# Altium PCB STM_System_Board.PCBDOC (part 3 of 16)
Units mm, origin at the board's own origin, x right, y up, seen from the top; angles counter-clockwise.
Board outline 222.53 x 100.01 mm, 6 copper layers (Top Layer, Int1 (GND), Int2 (Sign), Layer 1, Layer 2, Bottom Layer), stack 1.526 mm thick; 702 components, 774 nets, 3596 pads, 1988 vias.
Unrouted connection lines stored in the file: 1.
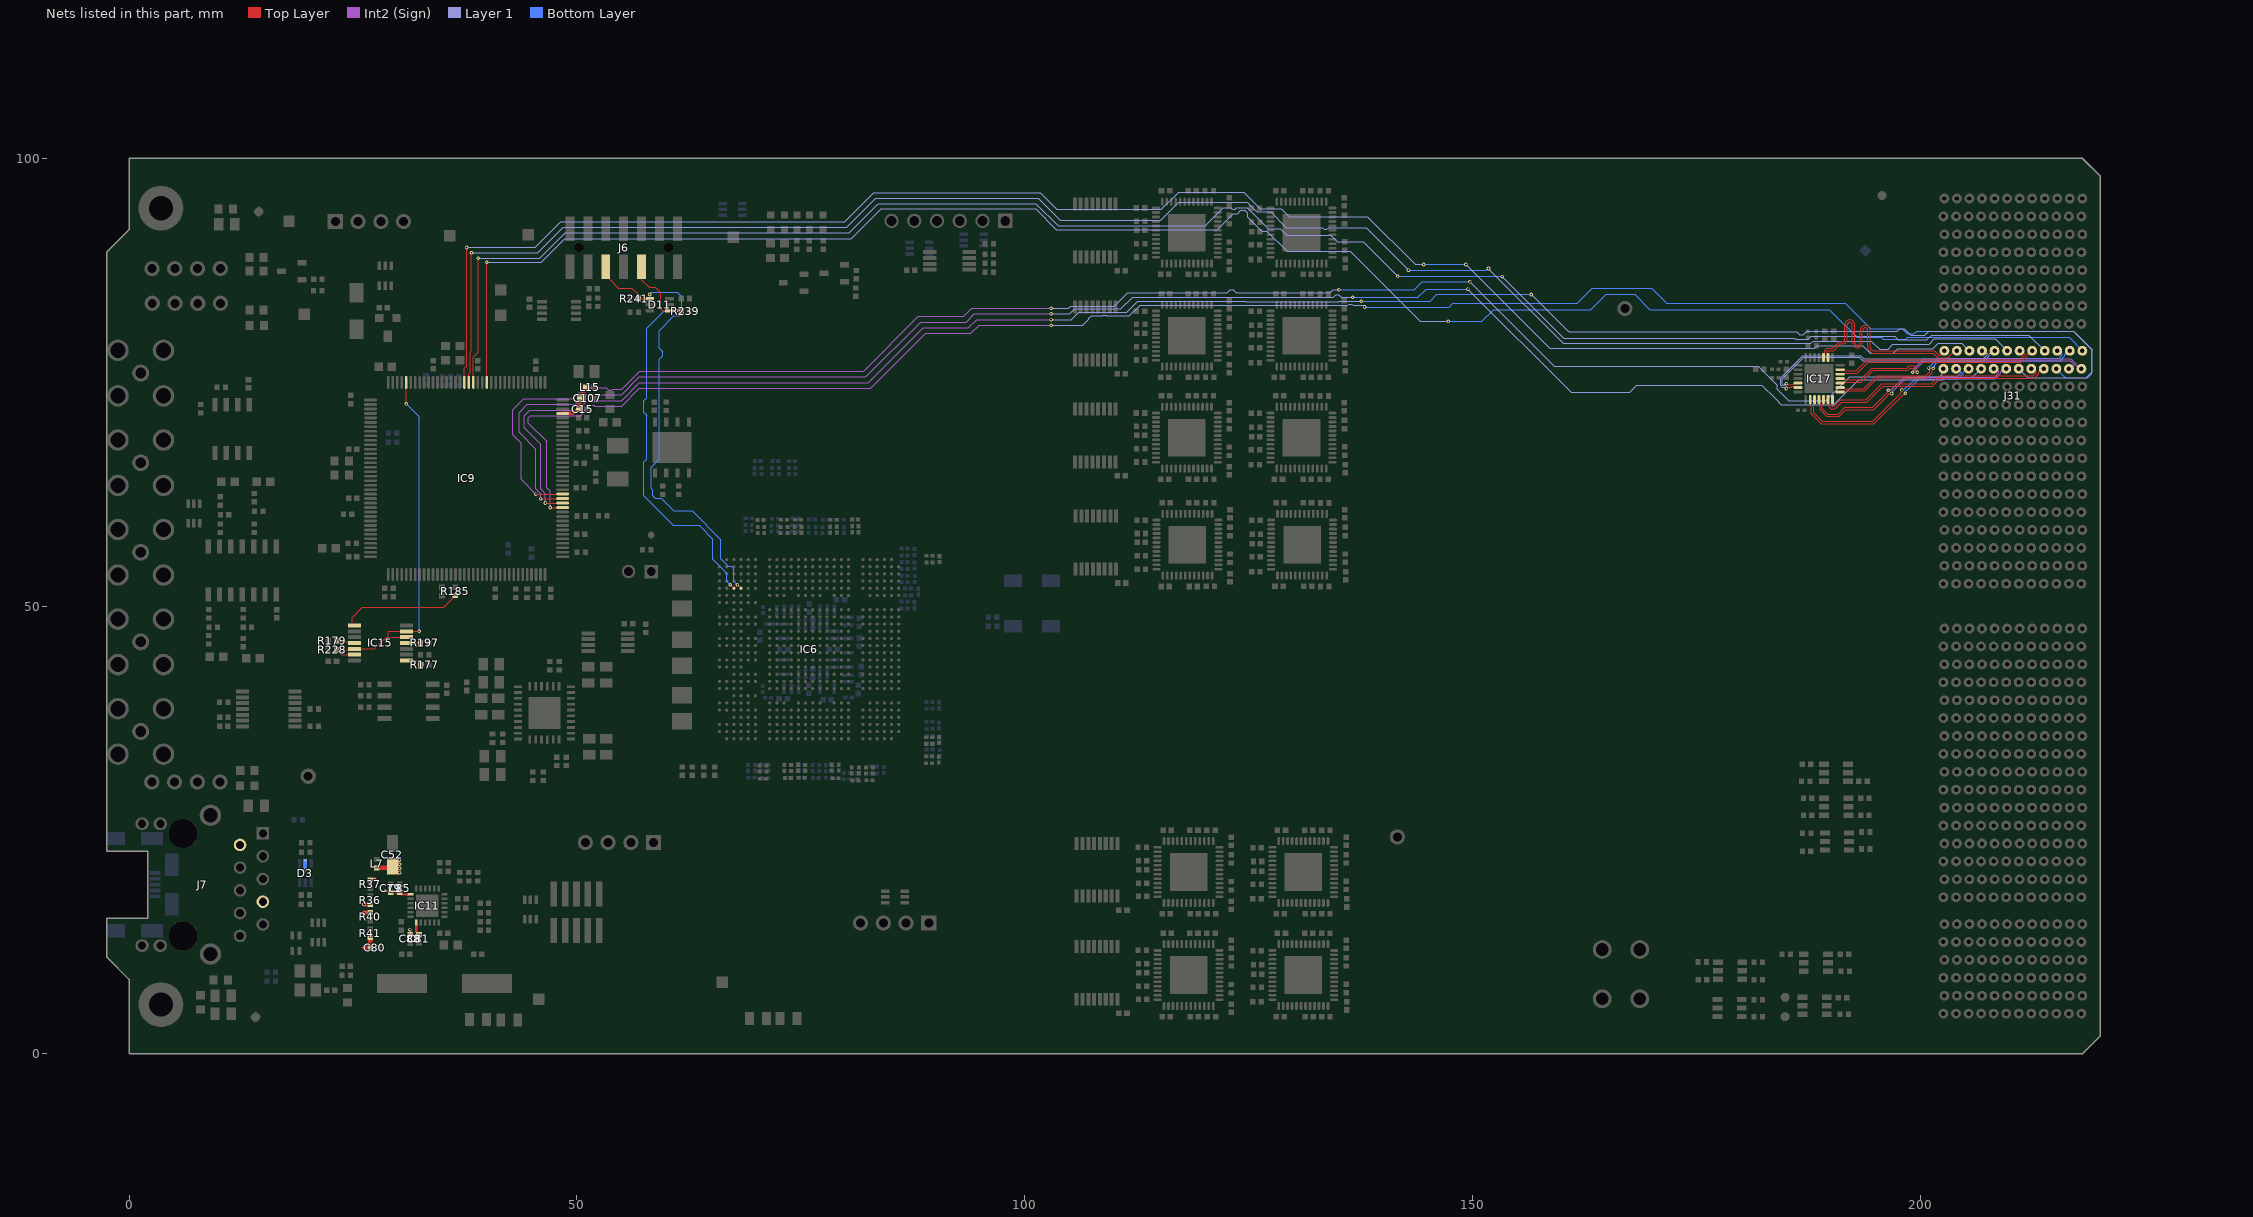
[diagram p7: the nets of this part, all layers, seen from the top]

## Footprints (in the part's own frame and the unit in brackets; to place one, negate y for a bottom-side part, rotate by r counter-clockwise, add the part's x,y. Pads: shape width x height; smd on the part's side, far side on the other; paste and mask are expansions set on the pad) (continued)
QFN50P700X700X100-49N-S420 [mm] "QFN, 0.50mm Pitch, Square; 48 Pin, 7.00mm L X 7.00mm W X 1mm H body (W/Thermal Tab 4.2mm X 4.2mm), IPC Medium Density"
  oval 0.9x0.3 smd: 1(-3.45,2.75) 2(-3.45,2.25) 3(-3.45,1.75) 4(-3.45,1.25) 5(-3.45,0.75) 6(-3.45,0.25) 7(-3.45,-0.25) 8(-3.45,-0.75) 9(-3.45,-1.25) 10(-3.45,-1.75) 11(-3.45,-2.25) 12(-3.45,-2.75) 25(3.45,-2.75) 26(3.45,-2.25) 27(3.45,-1.75) 28(3.45,-1.25) 29(3.45,-0.75) 30(3.45,-0.25) 31(3.45,0.25) 32(3.45,0.75) 33(3.45,1.25) 34(3.45,1.75) 35(3.45,2.25) 36(3.45,2.75)
  oval 0.3x0.9 smd: 13(-2.75,-3.45) 14(-2.25,-3.45) 15(-1.75,-3.45) 16(-1.25,-3.45) 17(-0.75,-3.45) 18(-0.25,-3.45) 19(0.25,-3.45) 20(0.75,-3.45) 21(1.25,-3.45) 22(1.75,-3.45) 23(2.25,-3.45) 24(2.75,-3.45) 37(2.75,3.45) 38(2.25,3.45) 39(1.75,3.45) 40(1.25,3.45) 41(0.75,3.45) 42(0.25,3.45) 43(-0.25,3.45) 44(-0.75,3.45) 45(-1.25,3.45) 46(-1.75,3.45) 47(-2.25,3.45) 48(-2.75,3.45)
  rect 4.2x4.2 smd: 49(0,0)
  silkscreen extent -4.25,-3.5 3.5,3.5, body extent -3.5,-3.5 3.5,3.5, height 1
RESC0603X28N [mm] "Chip Resistor, EIA 0201, Metric 0603, Body 0.6 x 0.3mm, IPC Medium Density"
  rect 0.46x0.42 smd: 1(-0.33,0) 2(0.33,0)
  body extent -0.32,-0.17 0.33,0.18, height 0.28
RESC1005X40N [mm] "Chip Resistor, EIA 0402, Metric 1005, Body 1.0x0.5mm, IPC Medium Density"
  rect 0.58x0.62 smd: 1(-0.47,0) 2(0.47,0)
  body extent -0.52,-0.27 0.53,0.28, height 0.4
RESC1608X55N [mm] "Chip Resistor, EIA 0603, Metric 1608, Body 1.6x0.8mm, IPC Medium Density"
  rect 0.9x1 smd: 1(-0.8,0) 2(0.8,0)
  body extent -0.87,-0.47 0.88,0.48, height 0.55
RESC2113X55N [mm] "Chip Resistor, EIA 0805, Metric 2113, Body 2.05x1.3mm, IPC Medium Density"
  rect 1x1.45 smd: 1(-0.95,0) 2(0.95,0)
  silkscreen extent 0,-0.55 0,0.55, body extent -1,-0.62 1,0.63, height 0.55
SAMTEC_FTSH-105-01-L-DV-K [mm] "10 Contacts, Pitch 1.27mm, Dual Row Straight Shrouded SMT Micro Header with Keying Shroud"
  rect 0.74x2.79 smd: 1(-2.554,-2.035) 2(-2.554,2.035) 3(-1.284,-2.035) 4(-1.284,2.035) 5(-0.014,-2.035) 6(-0.014,2.035) 7(1.256,-2.035) 8(1.256,2.035) 9(2.526,-2.035) 10(2.526,2.035)
  silkscreen extent -3.22,-4.22 3.17,3.78, body extent -3.17,-2.92 3.18,2.92, height 6.12
SAMTEC_HTSW-104-23-L-S [mm] "4 Contacts - Pitch 2.54mm - Single Row Through Mount Straigh Header (Post Lead 5.84mm, Tail Lead 2.92mm, Insulator 2.54mm)"
  rect 1.7x1.7 hole 1: 1(0,0)
  round 1.7 hole 1: 2(2.54,0) 3(5.08,0) 4(7.62,0)
  silkscreen extent -1.27,-1.27 8.89,1.93, body extent -1.27,-1.27 8.89,1.27, height 8.38
"SCHROFF_PANEL_3HP_4U - STM_sys_Board" [mm] "Schroff PCB 3HP 4U Eurocard Panel Kit"
  round 5 hole 2.7: 0(0,0) 1(0,88.9)
  silkscreen extent -6.1,-8.6 2.75,97.5, body extent -22.59,-19.72 3.01,108.68, height 16.94
SOIC127P600X175-8N [mm] "SOIC 8, Pitch 1.27mm - Body 4x5mm, IPC Medium Density"
  rect 1.55x0.6 smd: 1(-2.7,1.905) 2(-2.7,0.635) 3(-2.7,-0.635) 4(-2.7,-1.905) 5(2.7,-1.905) 6(2.7,-0.635) 7(2.7,0.635) 8(2.7,1.905)
  silkscreen extent -2.52,-2.5 1.55,2.88, body extent -3.1,-2.5 3.1,2.5, height 1.75
SOIC127P600X175-14N [mm] "SOIC 14, Pitch 1.27mm - Body 4x8.75mm, IPC Medium Density"
  rect 1.55x0.6 smd: 1(-2.7,3.81) 2(-2.7,2.54) 3(-2.7,1.27) 4(-2.7,0) 5(-2.7,-1.27) 6(-2.7,-2.54) 7(-2.7,-3.81) 8(2.7,-3.81) 9(2.7,-2.54) 10(2.7,-1.27) 11(2.7,0) 12(2.7,1.27) 13(2.7,2.54) 14(2.7,3.81)
  silkscreen extent -2.52,-4.4 1.55,4.79, body extent -3.1,-4.37 3.1,4.38, height 1.75
SON127P600X500X80-9N-R345X435 [mm] "SON, 1.27mm pitch, 8 pin, 6.00mm W X 5.00mm L X 0.80mm H body (w/thermal tab  3.45 X 4.35 mm), IPC Medium Density"
  rect 1.05x0.45 smd: 1(-2.85,1.905) 2(-2.85,0.635) 3(-2.85,-0.635) 4(-2.85,-1.905) 5(2.85,-1.905) 6(2.85,-0.635) 7(2.85,0.635) 8(2.85,1.905)
  rect 3.45x4.35 smd: 9(0,0)
  silkscreen extent -3.97,-2.5 1.95,2.5, body extent -3,-2.5 3,2.5, height 0.8
SOP65P400X130-8N [mm] "SOP, 0.65mm, Pitch; 8 Pin, 2.80mm W X 2.95mm L X 1.30mm H Body, PC Medium Density"
  rect 1.1x0.4 smd: 1(-1.9,0.975) 2(-1.9,0.325) 3(-1.9,-0.325) 4(-1.9,-0.975) 5(1.9,-0.975) 6(1.9,-0.325) 7(1.9,0.325) 8(1.9,0.975)
  silkscreen extent -2.32,-1.5 1.02,1.82, body extent -2.15,-1.57 2.15,1.58, height 1.3
SOP65P490X109-8N [mm] "SOP, 0.65mm pitch; 8 pin,3.00mm W X 3.00mm L X 1.09mm H bodyI, PC Medium Density"
  rect 1.5x0.45 smd: 1(-2.2,0.975) 2(-2.2,0.325) 3(-2.2,-0.325) 4(-2.2,-0.975) 5(2.2,-0.975) 6(2.2,-0.325) 7(2.2,0.325) 8(2.2,0.975)
  silkscreen extent -2.83,-1.5 1.12,1.82, body extent -2.45,-1.55 2.45,1.55, height 1.09
SOP65P640X110-14N [mm] "SOP, 14-Leads, Body 4.4x5mm (max), Pitch 0.65mm, IPC Medium Density"
  rect 1.45x0.45 smd: 1(-2.9,1.95) 2(-2.9,1.3) 3(-2.9,0.65) 4(-2.9,0) 5(-2.9,-0.65) 6(-2.9,-1.3) 7(-2.9,-1.95) 8(2.9,-1.95) 9(2.9,-1.3) 10(2.9,-0.65) 11(2.9,0) 12(2.9,0.65) 13(2.9,1.3) 14(2.9,1.95)
  silkscreen extent -3.48,-2.5 1.85,2.82, body extent -3.12,-2.55 3.12,2.55, height 1.1
SOP65P640X120-14N [mm] "SOP, 14-Leads, Body 5.1x4.5mm (max), Pitch 0.65mm, IPC Medium Density"
  rect 1.45x0.45 smd: 1(-2.95,1.95) 2(-2.95,1.3) 3(-2.95,0.65) 4(-2.95,0) 5(-2.95,-0.65) 6(-2.95,-1.3) 7(-2.95,-1.95) 8(2.95,-1.95) 9(2.95,-1.3) 10(2.95,-0.65) 11(2.95,0) 12(2.95,0.65) 13(2.95,1.3) 14(2.95,1.95)
  silkscreen extent -3.08,-2.55 1.85,2.85, body extent -3.12,-2.55 3.12,2.55, height 1.2
SOP65P640X120-16N [mm] "SOP, 0.65mm pitch; 16 pin, 4.40mm W X 5.00mm L X 1.20mm H body IPC Medium Density"
  rect 1.45x0.45 smd: 1(-2.95,2.275) 2(-2.95,1.625) 3(-2.95,0.975) 4(-2.95,0.325) 5(-2.95,-0.325) 6(-2.95,-0.975) 7(-2.95,-1.625) 8(-2.95,-2.275) 9(2.95,-2.275) 10(2.95,-1.625) 11(2.95,-0.975) 12(2.95,-0.325) 13(2.95,0.325) 14(2.95,0.975) 15(2.95,1.625) 16(2.95,2.275)
  silkscreen extent -3.07,-2.55 1.85,3.17, body extent -3.12,-2.55 3.12,2.55, height 1.2
SOT65P210X110-6N [mm] "SOT363, SC70-6, SOT, 0.65mm Pitch, 6 Pin, 1.25mm W X 2.00mm L X 1.10mm H, IPC Medium Density"
  rect 0.95x0.4 smd: 1(-1.1,0.65) 2(-1.1,0) 3(-1.1,-0.65) 4(1.1,-0.65) 5(1.1,0) 6(1.1,0.65)
  silkscreen extent -1.42,-1 0.3,1.48, body extent -1.2,-1.1 1.2,1.1, height 1.1
SOT95P230X110-3N [mm] "SOT23, 3 pin, Pitch 0.95mm - 1.3mm W X 2.9mm L X 1.1mm H, IPC Medium Density"
  rect 1x0.6 smd: 1(-1.15,0.95) 2(-1.15,-0.95) 3(1.15,0)
  silkscreen extent -1.53,-1.45 0.33,1.87, body extent -1.08,-1.5 1.25,1.5, height 1.1
SOT95P280X110-6N [mm] "SOT, 0.95mm Pitch; 6 Pin, 1.60mm W X 2.90mm L X 1.10mm H Body, IPC Medium Density"
  rect 1.1x0.6 smd: 1(-1.35,0.95) 2(-1.35,0) 3(-1.35,-0.95) 4(1.35,-0.95) 5(1.35,0) 6(1.35,0.95)
  silkscreen extent -1.77,-1.45 0.48,1.87, body extent -1.4,-1.5 1.4,1.5, height 1.1
SOT-23 [mil]
  rect 36x36 smd: 1(0,0) 2(75,0)
  rect 36x50 smd: 3(38,80)
  silkscreen extent -20,-5 95,85, body extent -21,-5 97,93, height 47
TPS127 [mm] "1.27 x  1.27mm SMD Test Point Area"
  rect 1.27x1.27 smd paste-1.27: 1(0,0)
  silkscreen extent -0.94,-0.94 0.94,0.94
TSQFP50P2200X2200X160-144N [mm] "TSQFP, 144-Leads, Body 20.00x20.00mm, Pitch 0.50mm, IPC Medium Density"
  oval 1.45x0.3 smd: 1(-10.725,8.75) 2(-10.725,8.25) 3(-10.725,7.75) 4(-10.725,7.25) 5(-10.725,6.75) 6(-10.725,6.25) 7(-10.725,5.75) 8(-10.725,5.25) 9(-10.725,4.75) 10(-10.725,4.25) 11(-10.725,3.75) 12(-10.725,3.25) 13(-10.725,2.75) 14(-10.725,2.25) 15(-10.725,1.75) 16(-10.725,1.25) 17(-10.725,0.75) 18(-10.725,0.25) 19(-10.725,-0.25) 20(-10.725,-0.75) 21(-10.725,-1.25) 22(-10.725,-1.75) 23(-10.725,-2.25) 24(-10.725,-2.75) 25(-10.725,-3.25) 26(-10.725,-3.75) 27(-10.725,-4.25) 28(-10.725,-4.75) 29(-10.725,-5.25) 30(-10.725,-5.75) 31(-10.725,-6.25) 32(-10.725,-6.75) 33(-10.725,-7.25) 34(-10.725,-7.75) 35(-10.725,-8.25) 36(-10.725,-8.75) 73(10.725,-8.75) 74(10.725,-8.25) 75(10.725,-7.75) 76(10.725,-7.25) 77(10.725,-6.75) 78(10.725,-6.25) 79(10.725,-5.75) 80(10.725,-5.25) 81(10.725,-4.75) 82(10.725,-4.25) 83(10.725,-3.75) 84(10.725,-3.25) 85(10.725,-2.75) 86(10.725,-2.25) 87(10.725,-1.75) 88(10.725,-1.25) 89(10.725,-0.75) 90(10.725,-0.25) 91(10.725,0.25) 92(10.725,0.75) 93(10.725,1.25) 94(10.725,1.75) 95(10.725,2.25) 96(10.725,2.75) 97(10.725,3.25) 98(10.725,3.75) 99(10.725,4.25) 100(10.725,4.75) 101(10.725,5.25) 102(10.725,5.75) 103(10.725,6.25) 104(10.725,6.75) 105(10.725,7.25) 106(10.725,7.75) 107(10.725,8.25) 108(10.725,8.75)
  oval 0.3x1.45 smd: 37(-8.75,-10.725) 38(-8.25,-10.725) 39(-7.75,-10.725) 40(-7.25,-10.725) 41(-6.75,-10.725) 42(-6.25,-10.725) 43(-5.75,-10.725) 44(-5.25,-10.725) 45(-4.75,-10.725) 46(-4.25,-10.725) 47(-3.75,-10.725) 48(-3.25,-10.725) 49(-2.75,-10.725) 50(-2.25,-10.725) 51(-1.75,-10.725) 52(-1.25,-10.725) 53(-0.75,-10.725) 54(-0.25,-10.725) 55(0.25,-10.725) 56(0.75,-10.725) 57(1.25,-10.725) 58(1.75,-10.725) 59(2.25,-10.725) 60(2.75,-10.725) 61(3.25,-10.725) 62(3.75,-10.725) 63(4.25,-10.725) 64(4.75,-10.725) 65(5.25,-10.725) 66(5.75,-10.725) 67(6.25,-10.725) 68(6.75,-10.725) 69(7.25,-10.725) 70(7.75,-10.725) 71(8.25,-10.725) 72(8.75,-10.725) 109(8.75,10.725) 110(8.25,10.725) 111(7.75,10.725) 112(7.25,10.725) 113(6.75,10.725) 114(6.25,10.725) 115(5.75,10.725) 116(5.25,10.725) 117(4.75,10.725) 118(4.25,10.725) 119(3.75,10.725) 120(3.25,10.725) 121(2.75,10.725) 122(2.25,10.725) 123(1.75,10.725) 124(1.25,10.725) 125(0.75,10.725) 126(0.25,10.725) 127(-0.25,10.725) 128(-0.75,10.725) 129(-1.25,10.725) 130(-1.75,10.725) 131(-2.25,10.725) 132(-2.75,10.725) 133(-3.25,10.725) 134(-3.75,10.725) 135(-4.25,10.725) 136(-4.75,10.725) 137(-5.25,10.725) 138(-5.75,10.725) 139(-6.25,10.725) 140(-6.75,10.725) 141(-7.25,10.725) 142(-7.75,10.725) 143(-8.25,10.725) 144(-8.75,10.725)
  silkscreen extent -10.85,-9.6 9.6,9.6, body extent -11,-11 11,11, height 1.6
XTAL_ABRACON_ABLS [mm] "HC/49US (AT49) SMD Cristal, Body 11.4x4.7mm, ABLS Serie"
  rect 5.6x2.1 smd: 1(-4.75,0) 2(4.75,0)
  silkscreen extent -5.8,-2.45 5.8,2.45, body extent -6.6,-2.45 6.6,2.45, height 4.2
XTAL_TXC_7A [mm] "2 Pins, 3.2x5mm, SMD Glass Seam Sealing Crystal, 7A Serie"
  rect 1.7x2.4 smd: 1(-1.85,0) 2(1.85,0)
  silkscreen extent -2.3,-1.6 2.3,1.6, body extent -2.5,-1.6 2.5,1.6, height 1.2

## Part data
B1: library part SMD_PAD_D0.75MM, "Through Hole Pad", Author="CERN DEM BC", Component Type="Standard (No BOM)", ComponentHeight=0mm, CreateDate=04.06.2020, Family="SMD Pad", HelpURL=Undefined, LatestRevisionDate=04.06.2020, Mounted=No, PackageDescription="0.75mm Diameter SMD Pad", Part Description="0.75mm Diameter SMD Pad", Part Number=SMD_PAD_D0.75MM, Pin Count=1, Sense=No, SMD=No, Socket=No, Status=None
B2 B3 B4: library part PLATED_HOLE1.0_PAD1.7, "Single Terminal Socket", Author="CERN DEM JLC", Component Type="Standard (No BOM)", ComponentHeight=0mm, CreateDate=11.05.2017, Family="Plated Hole", HelpURL=Undefined, LatestRevisionDate=11.05.2017, Mounted=No, PackageDescription="Plated Through Hole: Hole Dia.=1.0mm Pad Dia.=1.7mm,  IPC-7251 Level A", Part Description="Plated Through Hole: Hole Dia.=1.0mm Pad Dia.=1.7mm,  IPC-7251 Level A", Part Number=PLATED_HOLE1.0_PAD1.7, Pin Count=1, Sense=No, SMD=No, Socket=No, Status=None
B28 B29: library part SMD_PAD_D1MM, "Through Hole Pad", Author="CERN DEM JLC", Component Type="Standard (No BOM)", ComponentHeight=0mm, CreateDate=10.10.2017, Family="SMD Pad", HelpURL=Undefined, LatestRevisionDate=10.10.2017, Mounted=No, PackageDescription="1mm Diameter SMD Pad", Part Description="1mm Diameter SMD Pad", Part Number=SMD_PAD_D1MM, Pin Count=1, Sense=No, SMD=No, Socket=No, Status=None
C1 C5 C6 C8A C8B C8C C8D C8E C8F C9A C9B C9C C9D C9E C9F C12A C12B C12C C12D C12E C12F C13A C13B C13C C13D C13E C13F C15 C16A C16B C16C C16D C16E C16F C17A C17B C17C C17D C17E C17F C18A C18B C18C C18D C18E C18F C19A C19B C19C C19D C19E C19F C20A C20B C20C C20D C20E C20F C31 C35 C37 C38 C40 C41 C42 C43 C44 C45 C46 C47 C48 C53 C54 C57 C61 C62 C67 C69 C70 C71 C72 C73 C74 C75 C79 C80 C81 C84 C85 C88 C90 C96 C104 C105 C108 C109 C118 C119 C134 C135A C135B C135C C135D C135E C135F C136A C136B C136C C136D C136E C136F C137A C137B C137C C137D C137E C137F C138A C138B C138C C138D C138E C138F C139A C139B C139C C139D C139E C139F C140A C140B C140C C140D C140E C140F C141 C143: library part CC0402_100NF_16V_10%_X5R, "Non-polarised capacitor", Case=0402, Manufacturer=GENERIC, Manufacturer1 ComponentHeight=0.55mm, Manufacturer1 Example=MURATA, Manufacturer1 Part Number=GRM155R61C104KA88D, Tolerance=±10%, Voltage=16V, Author="CERN DEM JLC", Component Type=Standard, HelpURL=\\cern.ch\dfs\Applications\Altium\Datasheets\CC0402_X5R_MURATA_GRM.pdf, Manufacturer Part Number=CC0402_100NF_16V_10%_X5R, Mounted=Yes, Part Description="SMD Multilayer Chip Ceramic Capacitor", Part Number=CC0402_100NF_16V_10%_X5R, Pin Count=2, Sense=No, SMD=Yes, Socket=No, Status=None, TC=X5R
  C1 C5 C6 C8A C8B C8C C8D C8E C8F C9A C9B C9C C9D C9E C9F C12A C12B C12C C12D C12E C12F C13A C13B C13C C13D C13E C13F C16A C16B C16C C16D C16E C16F C17A C17B C17C C17D C17E C17F C18A C18B C18C C18D C18E C18F C19A C19B C19C C19D C19E C19F C20A C20B C20C C20D C20E C20F C40 C42 C44 C45 C46 C47 C48 C53 C54 C61 C62 C69 C75 C79 C80 C90 C96 C104 C105 C108 C109 C118 C119 C134 C135A C135B C135C C135D C135E C135F C136A C136B C136C C136D C136E C136F C137A C137B C137C C137D C137E C137F C138A C138B C138C C138D C138E C138F C139A C139B C139C C139D C139E C139F C140A C140B C140C C140D C140E C140F C141 C143: CreateDate=10.12.2013, LatestRevisionDate=10.12.2013
  C15 C31 C35 C37 C38 C41 C43 C57 C67 C70 C71 C72 C73 C74 C81 C84 C85 C88: CreateDate=10/12/2013, LatestRevisionDate=10/12/2013
C2 C3 C4 C7: library part CC0603_NO-VALUE, "Non-polarised capacitor", Case=0603, Manufacturer1 ComponentHeight=0.9mm, Author="CERN DEM MR", Component Type=Standard, CreateDate=22.11.2016, HelpURL=Undefined, LatestRevisionDate=22.11.2016, Manufacturer=Undefined, Manufacturer Part Number=CC0603_NO-VALUE, Mounted=No, Part Description="Reserved Footprint For 0603(1608) Chip Ceramic Capacitor", Part Number=CC0603_NO-VALUE, Pin Count=2, Sense=No, SMD=Yes, Socket=No, Status=None
C10 C11 C102 C103: library part CC0805_NO-VALUE, "Non-polarised capacitor", Case=0805, Manufacturer1 ComponentHeight=1.35mm, Author="CERN DEM JLC", Component Type=Standard, CreateDate=10.12.2008, HelpURL=Undefined, LatestRevisionDate=11.09.2013, Manufacturer=Undefined, Manufacturer Part Number=CC0805_NO-VALUE, Mounted=No, Part Description="Reserved Footprint For 0805(2012) Chip Ceramic Capacitor", Part Number=CC0805_NO-VALUE, Pin Count=2, Sense=No, SMD=Yes, Socket=No, Status=None
C14 C24 C25 C107: library part CC0603_2.2UF_10V_20%_X7R, "Non-polarised capacitor", Case=0603, Manufacturer=GENERIC, Manufacturer1 ComponentHeight=0.9mm, Manufacturer1 Example="TAIYO YUDEN", Manufacturer1 Part Number=LMK107B7225MA-T, Tolerance=±20%, Voltage=10V, Author="CERN DEM JLC", Component Type=Standard, CreateDate=22/06/2011, HelpURL=\\cern.ch\dfs\Applications\Altium\Datasheets\CC0603_X7R_TAIYO-YUDEN_HIGH-VALUE.pdf, LatestRevisionDate=27/06/2011, Manufacturer Part Number=CC0603_2.2UF_10V_20%_X7R, Mounted=Yes, Part Description="SMD Multilayer Chip Ceramic Capacitor", Part Number=CC0603_2.2UF_10V_20%_X7R, Pin Count=2, Sense=No, SMD=Yes, Socket=No, Status="Not Recommended", TC=X7R
C21 C23: library part CC0402_22PF_50V_5%_C0G, "Non-polarised capacitor", Case=0402, Manufacturer=GENERIC, Manufacturer1 ComponentHeight=0.55mm, Manufacturer1 Example=KEMET, Manufacturer1 Part Number=C0402C220J5GACTU, Tolerance=±5%, Voltage=50V, Author="CERN DEM JLC", Component Type=Standard, CreateDate=03/12/2007, HelpURL="\\cern.ch\dfs\Applications\Altium\Datasheets\CC0805_C0G_KEMET_(Commercial Grade).pdf", LatestRevisionDate=03/12/2007, Manufacturer Part Number=CC0402_22PF_50V_5%_C0G, Mounted=Yes, Part Description="SMD Multilayer Chip Ceramic Capacitor", Part Number=CC0402_22PF_50V_5%_C0G, Pin Count=2, Sense=No, SMD=Yes, Socket=No, Status=Preferred, TC=C0G/NP0
C22 C26 C27 C28 C29 C30 C32 C33 C34 C36: library part CC0805_22UF_16V_10%_X5R, "Non-polarised capacitor", Case=0805, Manufacturer=GENERIC, Manufacturer1 ComponentHeight=1.35mm, Manufacturer1 Example=TDK, Manufacturer1 Part Number=C2012X5R1C226KT, Tolerance=±10%, Voltage=16V, Author="CERN DEM JLC", Component Type=Standard, CreateDate=25.10.2012, HelpURL=\\cern.ch\dfs\Applications\Altium\Datasheets\CC0805_X5R_TDK_C.pdf, LatestRevisionDate=25.10.2012, Manufacturer Part Number=CC0805_22UF_16V_10%_X5R, Mounted=Yes, Part Description="SMD Multilayer Chip Ceramic Capacitor", Part Number=CC0805_22UF_16V_10%_X5R, Pin Count=2, Sense=No, SMD=Yes, Socket=No, Status=Preferred, TC=X5R
C39: library part CC0402_1UF_16V_10%_X5R, "Non-polarised capacitor", Case=0402, Manufacturer=GENERIC, Manufacturer1 ComponentHeight=0.55mm, Manufacturer1 Example=TDK, Manufacturer1 Part Number=C1005X5R1C105KT, Tolerance=±10%, Voltage=16V, Author="CERN DEM JLC", Component Type=Standard, CreateDate=2012-10-25, HelpURL=\\cern.ch\dfs\Applications\Altium\Datasheets\CC0402_X5R_TDK_C.pdf, LatestRevisionDate=2012-10-25, Manufacturer Part Number=CC0402_1UF_16V_10%_X5R, Mounted=Yes, Part Description="SMD Multilayer Chip Ceramic Capacitor", Part Number=CC0402_1UF_16V_10%_X5R, Pin Count=2, Sense=No, SMD=Yes, Socket=No, Status=Preferred, TC=X5R
C49 C50 C51 C55 C56 C58 C59 C60 C63 C64 C65 C66 C68 C76 C77 C86 C92 C93 C94 C95 C97 C98 C99 C100 C110 C111 C112 C113 C114 C115 C116 C117 C120 C121 C122 C123 C124 C125 C126 C127 C128 C129 C130 C131 C132 C133: library part CC0201_10NF_10V_10%_X5R, "Non-polarised capacitor", Case=0201, Manufacturer=GENERIC, Manufacturer1 ComponentHeight=0.33mm, Manufacturer1 Example=AVX, Manufacturer1 Part Number=0201ZD103KAT2A, Tolerance=±10%, Voltage=10V, Author="CERN DEM JLC", Component Type=Standard, CreateDate=03.12.2007, HelpURL=\\cern.ch\dfs\Applications\Altium\Datasheets\CC0201_X5R_AVX.pdf, LatestRevisionDate=03.12.2007, Manufacturer Part Number=CC0201_10NF_10V_10%_X5R, Mounted=Yes, Part Description="SMD Multilayer Chip Ceramic Capacitor", Part Number=CC0201_10NF_10V_10%_X5R, Pin Count=2, Sense=No, SMD=Yes, Socket=No, Status="Not Recommended", TC=X5R
C52: library part CTE3216-18_10UF_16V_20%_AVX_TCJ, "Polarised capacitor", Case=A, Manufacturer=AVX, Manufacturer Part Number=TCJA106M016R0200, Tolerance=±20%, Voltage=16V, Author="CERN DEM JLC", ComponentHeight=1.8mm, Component Type=Standard, CreateDate=29.03.2012, HelpURL=\\cern.ch\dfs\Applications\Altium\Datasheets\CTE_AVX_TCJ.pdf, LatestRevisionDate=29.03.2012, Mounted=Yes, Part Description="ESR 0R200 Tantalum Solid Electrolytic Chip Capacitor with Conductive Polymer Electrode", Part Number=CTE3216-18_10UF_16V_20%_AVX_TCJ, Pin Count=2, Sense=No, SMD=Yes, Socket=No, Status=Preferred
C78: library part CC0805_10UF_25V_10%_X5R, "Non-polarised capacitor", Case=0805, Manufacturer=GENERIC, Manufacturer1 ComponentHeight=0.95mm, Manufacturer1 Example=MURATA, Manufacturer1 Part Number=GRM219R61E106KA12D, Tolerance=±10%, Voltage=25V, Author="CERN DEM JLC", Component Type=Standard, CreateDate=25.10.2012, HelpURL=\\cern.ch\dfs\Applications\Altium\Datasheets\CC0805_X5R_MURATA_GRM.pdf, LatestRevisionDate=06.09.2016, Manufacturer Part Number=CC0805_10UF_25V_10%_X5R, Mounted=Yes, Part Description="SMD Multilayer Chip Ceramic Capacitor", Part Number=CC0805_10UF_25V_10%_X5R, Pin Count=2, Sense=No, SMD=Yes, Socket=No, Status=Preferred, TC=X5R
C82 C91: library part CC0402_30PF_50V_1%_C0G_MURATA_GJM1555C1H300FB01, "Non-polarised capacitor", Case=0402, Manufacturer=MURATA, Manufacturer Part Number=GJM1555C1H300FB01D, Tolerance=±1%, Voltage=50V, Author="CERN DEM BC", ComponentHeight=0.55mm, Component Type=Standard, CreateDate=20/11/2017, HelpURL=\\cern.ch\dfs\Applications\Altium\Datasheets\CC0402_MURATA_GJM1555C1H300FB01D.pdf, LatestRevisionDate=20/11/2017, Mounted=Yes, Part Description="High-Q SMD Chip Monolithic Ceramic Capacitor", Part Number=CC0402_30PF_50V_1%_C0G_MURATA_GJM1555C1H300FB01, Pin Count=2, Sense=No, SMD=Yes, Socket=No, Status="Not Recommended", TC=C0G/NP0
C83: library part CC0402_1NF_50V_10%_X7R, "Non-polarised capacitor", Case=0402, Manufacturer=GENERIC, Manufacturer1 ComponentHeight=0.55mm, Manufacturer1 Example=PHYCOMP, Manufacturer1 Part Number=223858715623, Tolerance=±10%, Voltage=50V, Author="CERN DEM JLC", Component Type=Standard, CreateDate=03/12/2007, HelpURL=\\cern.ch\dfs\Applications\Altium\Datasheets\CC0402_X7R_PHYCOMP.pdf, LatestRevisionDate=03/12/2007, Manufacturer Part Number=CC0402_1NF_50V_10%_X7R, Mounted=Yes, Part Description="SMD Multilayer Chip Ceramic Capacitor", Part Number=CC0402_1NF_50V_10%_X7R, Pin Count=2, Sense=No, SMD=Yes, Socket=No, Status="Not Recommended", TC=X7R
C87: library part CC0603_1UF_16V_10%_X7R, "Non-polarised capacitor", Case=0603, Manufacturer=GENERIC, Manufacturer1 ComponentHeight=0.9mm, Manufacturer1 Example="YAGEO PHYCOMP", Manufacturer1 Part Number=223878615663, Manufacturer Part Number=CC0603_1uF_16V_10%_X7R, Tolerance=±10%, Voltage=16V, Author="CERN DEM JLC", Component Type=Standard, CreateDate=03/12/2007, HelpURL=\\cern.ch\dfs\Applications\Altium\Datasheets\CC0603_X7R_PHYCOMP.pdf, LatestRevisionDate=17/04/2015, Mounted=Yes, Part Description="SMD Multilayer Chip Ceramic Capacitor", Part Number=CC0603_1UF_16V_10%_X7R, Pin Count=2, Sense=No, SMD=Yes, Socket=No, Status=None, TC=X7R
C89 C101 C106: library part CTE3528-21_100UF_6.3V_20%_LESR015_KEMET_T520, "Polarised capacitor", Case=B, Manufacturer=KEMET, Manufacturer Part Number=T520B107M006ATE015, Tolerance=±20%, Voltage=6.3V, Author="CERN DEM BC", Component Type=Standard, ComponentHeight=2.1mm, CreateDate=31.01.2022, HelpURL=\\cern.ch\dfs\Applications\Altium\Datasheets\CTE-LESR_KEMET_T520.pdf, LatestRevisionDate=31.01.2022, Mounted=Yes, Part Description="Low ESR 0R015 Tantalum Chip Capacitor", Part Number=CTE3528-21_100UF_6.3V_20%_LESR015_KEMET_T520, Pin Count=2, Sense=No, SMD=Yes, Socket=No, Status=None
C142: library part CC0402_100PF_50V_5%_C0G, "Non-polarised capacitor", Case=0402, Manufacturer=GENERIC, Manufacturer1 ComponentHeight=0.55mm, Manufacturer1 Example=KEMET, Manufacturer1 Part Number=C0402C101J5GACTU, Tolerance=±5%, Voltage=50V, Author="CERN DEM JLC", Component Type=Standard, CreateDate=03.12.2007, HelpURL="\\cern.ch\dfs\Applications\Altium\Datasheets\CC0805_C0G_KEMET_(Commercial Grade).pdf", LatestRevisionDate=22.04.2015, Manufacturer Part Number=CC0402_100PF_50V_5%_C0G, Mounted=Yes, Part Description="SMD Multilayer Chip Ceramic Capacitor", Part Number=CC0402_100PF_50V_5%_C0G, Pin Count=2, Sense=No, SMD=Yes, Socket=No, Status=Preferred, TC=C0G/NP0
D1: "Schottky Diode", Case=DO-214AC, Manufacturer="VISHAY GENERAL SEMICONDUCTOR", Power=1A, Voltage=60V, Author="CERN DEM JLC", Bonding=No, Component Type=Standard, ComponentHeight=2.29mm, CreateDate=15.07.2008, Device=SS16, HelpURL=\\cern.ch\dfs\Applications\Altium\Datasheets\SS16.pdf, LatestRevisionDate=23.08.2010, Manufacturer Part Number=SS16, Mounted=Yes, PackageDescription="DO-214-AC Molded Diode, Body 5.1x2.7mm, IPC Medium Density", Part Description="Surface Mount Schottky Barrier Rectifier", Part Number=SS16, Pin Count=2, PressFit=No, Sense=No, SMD=Yes, Socket=No
D2 D4 D5 D6 D7 D8 D9: "Quad Common Anode ESD Protection Diodes (30kV)", Case=SOT23-6, Manufacturer="NXP SEMICONDUCTORS", Power=200W, Voltage=3V3, Author="CERN DEM MR", Bonding=No, Component Type=Standard, ComponentHeight=1.1mm, CreateDate=08/02/2016, Device=PESD3V3S4UD, HelpURL=\\cern.ch\dfs\Applications\Altium\Datasheets\PESD3V3S4UD.pdf, LatestRevisionDate=16/01/2018, Manufacturer Part Number=PESD3V3S4UD, Mounted=Yes, PackageDescription="SOT, 0.95mm Pitch; 6 Pin, 1.60mm W X 2.90mm L X 1.10mm H Body, IPC Medium Density", Part Description="Quad Common Anode ESD Protection Diodes (30kV)", Part Number=PESD3V3S4UD, Pin Count=6, PressFit=No, Sense=No, SMD=Yes, Socket=No
D3 D10 D11 D12 D13 D14 D15 D16 D22 D28: library part D_TVS_DRTR5V0U4S-7, "Integrated Quad Ultra-Low Capacitance ESD Protection", Case=SOT363, Manufacturer=DIODES, Author=GK, Bonding=No, Component Type=Standard, ComponentHeight=1.1mm, CreateDate=24.01.2017, Device=DRTR5V0U4S-7, HelpURL=\\cern.ch\dfs\Applications\Altium\Datasheets\PRTR5V0U4Y.pdf, LatestRevisionDate=14.09.2020, Manufacturer Part Number=DRTR5V0U4S-7, Mounted=Yes, PackageDescription="SOT363, SC70-6, 0.65mm Pitch; 6 Pin, 1.25mm W X 2.00mm L X 1.10mm H body, IPC Medium Density", Part Description="Integrated Quad Ultra-Low Capacitance ESD (±8kV) Protection", Part Number=DRTR5V0U4S-7, Pin Count=6, PressFit=No, Sense=No, SMD=Yes, Socket=No, Status=Active, Status Comment=Active
FB1 FB2: library part IND0805_MURATA_BLM21PG221SN1D, "Inductor", Case=0805, Manufacturer=MURATA, Manufacturer Part Number=BLM21PG221SN1D, Power=2A, Resistance=0.05R, Tolerance=±25%, Author="CERN DEM JLC", ComponentHeight=1.05mm, Component Type=Standard, CreateDate=2010-01-25, HelpURL=\\cern.ch\dfs\Applications\Altium\Datasheets\IND0402_MURATA_BLM21P.pdf, LatestRevisionDate=2010-01-25, Mounted=Yes, Part Description="SMD EMIFIL Suppression Chip Ferrite Bead", Part Number=IND0805_MURATA_BLM21PG221SN1D, Pin Count=2, SMD=Yes, Socket=No, Status=None, Table="Inductors SMD"
FTG1 FTG5 FTG6: library part FIDUCIAL_TARGET_C100-200, "Fiducial Target", Author="CERN DEM JLC", ComponentHeight=0mm, Component Type="Standard (No BOM)", CreateDate=09.02.2010, Family=Fiducial, HelpURL=Undefined, LatestRevisionDate=04.04.2012, Mounted=No, PackageDescription="Round Fiducial Target, Top Layer, 1.0mm, Top Solder 2.0mm, Keepout =2.0mm", Part Description="Round Fiducial Target, Top Layer, 1.0mm, Top Solder 2.0mm, Keepout =2.0mm", Part Number=FIDUCIAL_TARGET_C100-200, Pin Count=1, Sense=No, SMD=Yes, Socket=No, Status=None
FTG2 FTG3 FTG4: library part FIDUCIAL_TARGET_S100-200, "Fiducial Target", Author="CERN DEM JLC", Component Type="Standard (No BOM)", ComponentHeight=0mm, CreateDate=09.02.2010, Family=Fiducial, HelpURL=Undefined, LatestRevisionDate=04.04.2012, Mounted=No, PackageDescription="Square Fiducial Target, Top Layer, 1.0mm, Top Solder 2.0mm, Keepout =2.0mm", Part Description="Square Fiducial Target, Top Layer, 1.0mm, Top Solder 2.0mm, Keepout =2.0mm", Part Number=FIDUCIAL_TARGET_S100-200, Pin Count=1, Sense=No, SMD=Yes, Socket=No, Status=None
IC1: "1.7V-5.5V, 2K I2C™ Serial EEPROMs with EUI-48™ Node Identity", Case=SOIC8, Manufacturer="MICROCHIP TECHNOLOGY", Author="CERN DEM MR", Bonding=No, Component Type=Standard, ComponentHeight=1.75mm, CreateDate=2016-07-19, Device=24AA025E48-I/SN, HelpURL=\\cern.ch\dfs\Applications\Altium\Datasheets\24AA025E48-I-SN.pdf, LatestRevisionDate=2016-07-19, Manufacturer Part Number=24AA025E48-I/SN, Mounted=Yes, PackageDescription="SOIC, 1.27mm Pitch; 8 Pin - Body 4x5mm, IPC Medium Density", Part Description="1.7V-5.5V, 2K I2C™ Serial EEPROMs with EUI-48™ Node Identity", Part Number=24AA025E48-I/SN, Pin Count=8, PressFit=No, Sense=No, SMD=Yes, Socket=No
IC2: "Quadruple Bus Buffer with 3-State Outputs", Case=TSSOP14, Manufacturer="TEXAS INSTRUMENTS", Author="CERN DEM BC", Bonding=No, Component Type=Standard, ComponentHeight=1.2mm, CreateDate=08.12.2020, Device=SN74HCS126PW, HelpURL=\\cern.ch\dfs\Applications\Altium\Datasheets\SN74HCS126PW.pdf, LatestRevisionDate=08.12.2020, Manufacturer Part Number=SN74HCS126PW, Mounted=Yes, PackageDescription="SOP, 0.65mm Pitch; 14 Pin, 4.40mm W X 5.00mm L X 1.20mm H body, IPC Medium Density", Part Description="Quadruple Buffer with 3-State Outputs and Schmitt-Trigger Inputs", Part Number=SN74HCS126PW, Pin Count=14, PressFit=No, Sense=No, SMD=Yes, Socket=No
IC3: "Quadruple Bus Buffer with 3-State Outputs", Case=SOIC14, Manufacturer="TEXAS INSTRUMENTS", Author="CERN DEM JLC", Bonding=No, Component Type=Standard, ComponentHeight=1.75mm, CreateDate=30.06.2011, Device=SN74HC125D, HelpURL=\\cern.ch\dfs\Applications\Altium\Datasheets\SN74HC125D.pdf, LatestRevisionDate=30.06.2011, Manufacturer Part Number=SN74HC125D, Mounted=Yes, PackageDescription="SOIC 14, Pitch 1.27mm - Body 4x8.75mm, IPC Medium Density", Part Description="Quadruple Bus Buffer with 3-State Outputs", Part Number=SN74HC125D, Pin Count=14, PressFit=No, Sense=No, SMD=Yes, Socket=No
IC4 IC5: "Digital Temperature Sensor and Thermal Watchdog with Two-Wire Interface", Case=SSOP8, Manufacturer="TEXAS INSTRUMENTS", Author="CERN DEM JLC", Bonding=No, Component Type=Standard, ComponentHeight=1.09mm, CreateDate=15.10.2012, Device=LM75AIMM/NOPB, HelpURL=\\cern.ch\dfs\Applications\Altium\Datasheets\LM75AIMM-NOPB.pdf, LatestRevisionDate=15.10.2012, Manufacturer Part Number=LM75AIMM/NOPB, Mounted=Yes, PackageDescription="SOP, 0.65mm pitch; 8 pin,3.00mm W X 3.00mm L X 1.09mm H bodyI, PC Medium Density", Part Description="-25° to +100°C ±2°C Digital Temperature Sensor and Thermal Watchdog with Two-Wire Interface", Part Number=LM75AIMM/NOPB, Pin Count=8, PressFit=No, Sense=No, SMD=Yes, Socket=No
IC6: Case=BGA554, Manufacturer="LATTICE SEMICONDUCTOR", Author="CERN DEM HF", Bonding=No, Component Type=Standard, ComponentHeight=1.76mm, ComponentLink1Description="Package Drawing", ComponentLink1URL=\\cern.ch\dfs\Applications\Altium\Datasheets\LATTICE_Package.pdf, ComponentLink2Description=Pinout, ComponentLink2URL=\\cern.ch\dfs\Applications\Altium\Datasheets\LFE5U-85F-6BG554C_Pinout.pdf, CreateDate=18.02.2022, Device=LFE5U-85F-6BG554C, HelpURL=\\cern.ch\dfs\Applications\Altium\Datasheets\LFE5U-85F-6BG554C.pdf, LatestRevisionDate=18.02.2022, Manufacturer Part Number=LFE5U-85F-6BG554C, Mounted=Yes, PackageDescription="BGA, 0.80mm Pitch, Square; 554Pin, 26 Columns X 26 Rows, 23mm X 23mm X 1.76mm H", Part Description="FPGA LatticeECP5 Family 84000 Cells 40nm Technology 1.1V 554-Pin CABGA Tray", Part Number=LFE5U-85F-6BG554C, Pin Count=554, PressFit=No, Sense=No, SMD=Yes, Socket=No
IC7A IC7B IC7C IC7D IC7E IC7F IC12A IC12B IC12C IC12D IC12E IC12F: "3.3 V Quad Channel Half‐Duplex M-LVDS Driver Receiver", Case=QFN48, Manufacturer="ON SEMICONDUCTOR", Author="CERN DEM HF", Bonding=No, Component Type=Standard, ComponentHeight=1mm, CreateDate=18.02.2022, Device=NB3N401SMNTXG, HelpURL=\\cern.ch\dfs\Applications\Altium\Datasheets\NB3N401SMNTXG.pdf, LatestRevisionDate=18.02.2022, Manufacturer Part Number=NB3N401SMNTXG, Mounted=Yes, PackageDescription="QFN, 0.50mm Pitch, Square; 48 Pin, 7.00mm L X 7.00mm W X 1.00mm H body (w/Thermal Tab 4.20 X 4.20mm), IPC Medium Density", Part Description="3.3 V Quad Channel Half‐Duplex M-LVDS Driver Receiver", Part Number=NB3N401SMNTXG, Pin Count=49, PressFit=No, Sense=No, SMD=Yes, Socket=No
IC8A IC8B IC8C IC8D IC8E IC8F: "8-Bit Shift Register With 3-State Output Register", Case=TSSOP16, Manufacturer="TEXAS INSTRUMENTS", Author="CERN DEM JLC", Bonding=No, Component Type=Standard, ComponentHeight=1.2mm, CreateDate=10.05.2012, Device=SN74LV595APWT, HelpURL=\\cern.ch\dfs\Applications\Altium\Datasheets\SN74LV595APWT.pdf, LatestRevisionDate=10.05.2012, Manufacturer Part Number=SN74LV595APWT, Mounted=Yes, PackageDescription="SOP, 0.65mm pitch; 16 pin, 4.40mm W X 5.00mm L X 1.20mm H body IPC Medium Density", Part Description="8-Bit Shift Register With 3-State Output Register", Part Number=SN74LV595APWT, Pin Count=16, PressFit=No, Sense=No, SMD=Yes, Socket=No
IC9: library part UPC_STM32H743ZIT6, "32-bit Arm® Cortex-M7 400MHz MCUs, up to 2MB Flash, / 1MB RAM, 46 com. and analog interfaces", Manufacturer=STMicroelectronics, Manufacturer Part Number=STM32H743ZIT6
IC10: library part VMON_STM809, "2.93V  Reset circuit", Manufacturer=STMicroelectronics, Manufacturer Part Number=STM809SWX6F
IC11: library part IFC_LAN8742A, "LAN8742A-CZ-TR - Small Footprint RMII 10/100 Ethernet, Transceiver with HP Auto-MDIX and flexPWR Technology SQFN-24", Manufacturer=MICROCHIP, Distrib=MICROCHIP, Manufacturer Part Number=LAN8742A-CZ-TR, Order=LAN8742A-CZ-TR
IC13: library part MPM54304GMN, "Quad-Output Power Module with I2C and MTP", Case=QFN32, Manufacturer="MPS (MONOLITIC  POWER SYSTEMS)", Author="CERN DEM BC", Bonding=No, Component Type=Standard, ComponentHeight=2.1mm, CreateDate=09.11.2020, Device=MPM54304GMN-0003, HelpURL=\\cern.ch\dfs\Applications\Altium\Datasheets\MPM54304GMN.pdf, LatestRevisionDate=09.11.2020, Manufacturer Part Number=MPM54304GMN-0003, Mounted=Yes, PackageDescription="MPS LGA-33 Case, 0.65mm Pitch, Rect.; 32 Pin, 7.00mm L X 7.00mm W X 2.10mm H body (w/Thermal Tab 3.55 X 3.55mm)", Part Description="4V to 16V Input, Quad-Output Power Module with I2C and MTP", Part Number=MPM54304GMN-0003, Pin Count=33, PressFit=No, Sense=No, SMD=Yes, Socket=No
IC14: "128M-bit Serial Flash Memory with uniform 4KB sectors and Dual/Quad SPI and QPI", Case=SON8, Manufacturer=WINBOND, Author="CERN DEM BC", Bonding=No, Component Type=Standard, ComponentHeight=0.8mm, CreateDate=24.01.2019, Device=W25Q128JVPIQ, HelpURL=\\cern.ch\dfs\Applications\Altium\Datasheets\W25Q128JVPIQ.pdf, LatestRevisionDate=24.01.2019, Manufacturer Part Number=W25Q128JVPIQ, Mounted=Yes, PackageDescription="SON, 1.27mm Pitch; 8 Pin, 6.00mm W X 5.00mm L X 0.8mm H body (w/Thermal Tab 3.45mm x 4.35mm)", Part Description="128M-bit Serial Flash Memory with uniform 4KB sectors and Dual/Quad SPI and QPI", Part Number=W25Q128JVPIQ, Pin Count=9, PressFit=No, Sense=No, SMD=Yes, Socket=No
IC15: Case=TSSOP14, Manufacturer="NXP SEMICONDUCTORS", Author="CERN DEM JLC", Bonding=No, Component Type=Standard, ComponentHeight=1.1mm, CreateDate=2014-11-19, Device=74HC4066PW, HelpURL=\\cern.ch\dfs\Applications\Altium\Datasheets\74HC4066PW.pdf, LatestRevisionDate=2014-11-19, Manufacturer Part Number=74HC4066PW, Mounted=Yes, PackageDescription="SOP, 14-Leads, Body 4.4x5mm (max), Pitch 0.65mm, IPC Medium Density", Part Description="Quad Single-Pole Single-Throw Analog Switch", Part Number=74HC4066PW, Pin Count=14, PressFit=No, SMD=Yes, Socket=No, Table="Standard Logic"
IC16: "1.2V to 37V, 100mA Adjustable Positive Regulator", Case=SOIC8, Manufacturer="TEXAS INSTRUMENTS", Author="CERN DEM JLC", Bonding=No, Component Type=Standard, ComponentHeight=1.75mm, CreateDate=12.04.2012, Device=LM317LM/NOPB, HelpURL=\\cern.ch\dfs\Applications\Altium\Datasheets\LM317LM-NOPB.pdf, LatestRevisionDate=16.09.2014, Manufacturer Part Number=LM317LM/NOPB, Mounted=Yes, PackageDescription="SOIC 8, Pitch 1.27mm, Body 4x5mm, IPC Medium Density", Part Description="1.2V to 37V, 100mA Adjustable Positive Voltage Regulator", Part Number=LM317LM/NOPB, Pin Count=8, PressFit=No, Sense=No, SMD=Yes, Socket=No
IC17: "2:8 Low Additive Jitter LVDS Buffer", Case=QFN28, Manufacturer="TEXAS INSTRUMENTS", Manufacturer Part Number=CDCLVD1208RHD, Author="CERN DEM JLC", Bonding=No, Component Type=Standard, ComponentHeight=1mm, CreateDate=28.06.2012, Device=CDCLVD1208RHDT, HelpURL=\\cern.ch\dfs\Applications\Altium\Datasheets\CDCLVD1208RHDT.pdf, LatestRevisionDate=10.06.2022, Mounted=Yes, PackageDescription="QFN, 0.50mm Pitch, Square; 28 pin, 5.00mm L X 5.00mm W X 1.00mm H body (w/Thermal Tab 3.25 X 3.25mm), IPC Medium Density", Part Description="2:8 Low Additive Jitter LVDS Buffer", Part Number=CDCLVD1208RHDT, Pin Count=29, PressFit=No, Sense=No, SMD=Yes, Socket=No
IC18: "Dual Bidirectional I2C Bus And SMBus Voltage-Level Translator", Case=SSOP8, Manufacturer="TEXAS INSTRUMENTS", Author="CERN DEM JLC", Bonding=No, Component Type=Standard, ComponentHeight=1.3mm, CreateDate=25.02.2013, Device=PCA9306DCTR, HelpURL=\\cern.ch\dfs\Applications\Altium\Datasheets\PCA9306DCTR.pdf, LatestRevisionDate=11.02.2016, Manufacturer Part Number=PCA9306DCTR, Mounted=Yes, PackageDescription="SOP, 0.65mm, Pitch; 8 Pin, 2.80mm W X 2.95mm L X 1.30mm H Body, PC Medium Density", Part Description="Dual Bidirectional I2C Bus And SMBus Voltage-Level Translator", Part Number=PCA9306DCTR, Pin Count=8, PressFit=No, Sense=No, SMD=Yes, Socket=No
J1 J2 J4 J5 J10: library part AMPHENOL_919-383J-51A, Manufacturer=AMPHENOL, Manufacturer Part Number=919-383J-51A, Author="CERN DEM BC", Component Type=Standard, ComponentHeight=6mm, CreateDate=31.01.2019, Family=MCX, HelpURL=\\cern.ch\dfs\Applications\Altium\Datasheets\AMPHENOL_919-383J-51A.pdf, LatestRevisionDate=31.01.2019, Mounted=Yes, Part Description="50 Ohm, RF Connector, MCX Right Angle PCB Receptacle Jack", Part Number=AMPHENOL_919-383J-51A, Pin Count=5, PressFit=No, Sense=No, SMD=No, Socket=No, Status=None
J3 J15 W1: library part SAMTEC_HTSW-104-23-L-S, "4 Mini Wire-Wrap Contact Strip Header", Manufacturer=SAMTEC, Manufacturer Part Number=HTSW-104-23-L-S, Author="CERN DEM JLC", Component Type=Standard, ComponentHeight=8.38mm, Family="Header 4", HelpURL=\\cern.ch\dfs\Applications\Altium\Datasheets\SAMTEC_HTSW-104-23-L-S.pdf, Mounted=Yes, Part Description="4 Contacts, Pitch 2.54mm, Single Row  Through Mount Straight Header (Post Lead 5.84mm, Tail Lead 2.92mm, Insulator 2.54mm)", Part Number=SAMTEC_HTSW-104-23-L-S, Pin Count=4, PressFit=No, Sense=No, SMD=No, Socket=No, Status=Preferred, Status Comment="High Temperature"
  J3 J15: CreateDate=2018-02-22, LatestRevisionDate=2018-02-22
  W1: CreateDate=22/02/2018, LatestRevisionDate=22/02/2018
J6: library part MOLEX_87832-1420, "Connector 14 Male", Manufacturer=MOLEX, Manufacturer Part Number=87832-1420, Author="CERN DEM JLC", Component Type=Standard, ComponentHeight=7.6mm, CreateDate=09.09.2008, Family=Milli-Grid™, HelpURL=\\cern.ch\dfs\Applications\Altium\Datasheets\MOLEX_87832-1420.pdf, LatestRevisionDate=09.09.2008, Mounted=Yes, Part Description="2.00mm (.079\") Pitch Milli-Grid™ Header, Surface Mount, Vertical, Shrouded, 14 Circuits,with Locking Windows and Centre Polarization Slot, PCB Locator", Part Number=MOLEX_87832-1420, Pin Count=14, PressFit=No, Sense=No, SMD=Yes, Socket=No, Status=None
J7: library part CON_ETH_POE_ARJM11C7, "MagJack 10/100BaseT, PoE+, 1X1, OG/Y, -40 to 85*C, Tab Up, RoHS", Manufacturer=Abracon, Manufacturer Part Number=ARJM11C7-114-BA-EW2, Author=GK, ComponentHeight=13.61mm, Component Type=Standard, CreateDate=05.11.2012, Family=RJ45, HelpURL=\\cern.ch\dfs\Applications\Altium\Datasheets\BELFUSE_0826-1X1T-GJ-F.pdf, LatestRevisionDate=05.11.2012, Mounted=Yes, Part Description="1 Port, Orange Green/Yellow LEDs, RJ45 10/100BaseT, PoE, Ethernet MagJack® Connector Module", Part Number=ARJM11C7-114-BA-EW2, Pin Count=18, PressFit=No, Sense=No, SMD=No, Socket=No, Status=None
J8: library part SAMTEC_FTSH-105-01-L-DV-K, "Connector 10 Male", Manufacturer=SAMTEC, Manufacturer Part Number=FTSH-105-01-L-DV-K, Author="CERN DEM BC", Component Type=Standard, ComponentHeight=6.25mm, CreateDate=2020-01-17, Family="Header 10", HelpURL=\\cern.ch\dfs\Applications\Altium\Datasheets\SAMTEC_FTSH-105-01-L-DV-K.pdf, LatestRevisionDate=2020-01-17, Mounted=Yes, Part Description="10 Contacts, Pitch 1.27mm, Dual Row Straight Shrouded SMT Micro Header with Keying Shroud", Part Number=SAMTEC_FTSH-105-01-L-DV-K, Pin Count=10, PressFit=No, Sense=No, SMD=Yes, Socket=No, Status=None
J9: "CONN RCPT 5POS MICRO USB R/A", Digikey Part Number=WM17142CT-ND, Manufacturer=Molex, Manufacturer Part Number=47491-0001, Mouser Part Number=538-47491-0001, Package=SMT_USB_11MM00_9MM13, Temperature="-30°C to +85°C", Temperature Range High=+85°C, Temperature Range Low=-30°C, ComponentLink1Description=Upverter, ComponentLink1URL=https://upverter.com/upn/revision/f866fe3250cf79e5/, ComponentLink2Description=Datasheet, ComponentLink2URL=http://www.molex.com/pdm_docs/sd/474910001_sd.pdf, Digikey Description="CONN RCPT 5POS MICRO USB R/A", HelpURL=https://upverter.com/upn/revision/f866fe3250cf79e5/, Is Female=yes, Lead Free=yes, RoHS=TRUE, Supplier 1=Digi-Key, Supplier 2=Mouser, Supplier Part Number 1=WM17142CT-ND, Supplier Part Number 2=538-47491-0001
J11: library part AMPHENOL_10052838-101LF, "96 Contacts Header, 8 Columns, 4 Pairs per Column", Manufacturer=AMPHENOL, Manufacturer Part Number=10052838-101LF, Author="CERN DEM MR", ClassName=Overlapping, ComponentHeight=15.35mm, ComponentLink1Description=Application, ComponentLink1URL=\\cern.ch\dfs\Applications\Altium\Datasheets\AMPHENOL_10052838-101LF_Application.pdf, Component Type=Standard, CreateDate=19/02/2018, Family="AirMax VS", HelpURL=\\cern.ch\dfs\Applications\Altium\Datasheets\AMPHENOL_10052838-101LF.pdf, LatestRevisionDate=19/02/2018, Mounted=Yes, Part Description="96 Contacts, 2mm Pitch, 8 Columns, 4 Pairs per Column, 4 Walls, Right Angle Header", Part Number=AMPHENOL_10052838-101LF, Pin Count=96, PressFit=Yes, Sense=No, SMD=No, Socket=No, Status=None
J12 J29 J33: library part AMPHENOL_10052837-101LF, "96 Contacts Header, 8 Columns, 4 Pairs per Column", Manufacturer=AMPHENOL, Manufacturer Part Number=10052837-101LF, Author="CERN DEM MR", ComponentHeight=15.35mm, ComponentLink1Description=Application, ComponentLink1URL=\\cern.ch\dfs\Applications\Altium\Datasheets\AMPHENOL_10052837-101LF_Application.pdf, Component Type=Standard, CreateDate=19/02/2018, Family="AirMax VS", HelpURL=\\cern.ch\dfs\Applications\Altium\Datasheets\AMPHENOL_10052837-101LF.pdf, LatestRevisionDate=19/02/2018, Mounted=Yes, Part Description="96 Contacts, 2mm Pitch, 8 Columns, 4 Pairs per Column, 2 Walls, Right Angle Header", Part Number=AMPHENOL_10052837-101LF, Pin Count=96, PressFit=Yes, Sense=No, SMD=No, Socket=No, Status=None
J13: library part MOLEX_39-28-1043, "Connector 4 Male", Manufacturer=MOLEX, Manufacturer Part Number=39-28-1043, Author="CERN DEM JLC", Component Type=Standard, ComponentHeight=13.1mm, CreateDate=12.03.2009, Family="Mini-Fit Jr.™", HelpURL=\\cern.ch\dfs\Applications\Altium\Datasheets\MOLEX_39-28-1043.pdf, LatestRevisionDate=06.03.2012, Mounted=Yes, Part Description="4.20mm (.165\") Pitch Mini-Fit Jr.™ Header, Dual Row, Vertical, without Snap-in Plastic Peg PCB Lock, 4 Circuits", Part Number=MOLEX_39-28-1043, Pin Count=4, PressFit=No, Sense=No, SMD=No, Socket=No, Status=None
J14: library part AMPHENOL_10052825-101LF, "72 Contacts Header, 6 Columns, 4 Pairs per Column", Manufacturer=AMPHENOL, Manufacturer Part Number=10052825-101LF, Author="CERN DEM MR", ClassName=Overlapping, Component Type=Standard, ComponentHeight=15.35mm, ComponentLink1Description=Application, ComponentLink1URL=\\cern.ch\dfs\Applications\Altium\Datasheets\AMPHENOL_10052825-101LF_Application.pdf, CreateDate=19/02/2018, Family="AirMax VS", HelpURL=\\cern.ch\dfs\Applications\Altium\Datasheets\AMPHENOL_10052825-101LF.pdf, LatestRevisionDate=19/02/2018, Mounted=Yes, Part Description="72 Contacts, 2mm Pitch, 6 Columns, 4 Pairs per Column, 4 Walls, Right Angle Header", Part Number=AMPHENOL_10052825-101LF, Pin Count=72, PressFit=Yes, Sense=No, SMD=No, Socket=No, Status=None
J31: library part AMPHENOL_10052824-101LF, "72 Contacts Header, 6 Columns, 4 Pairs per Column", Manufacturer=AMPHENOL, Manufacturer Part Number=10052824-101LF, Author="CERN DEM JMW", ComponentHeight=15.35mm, ComponentLink1Description=Application, ComponentLink1URL=\\cern.ch\dfs\Applications\Altium\Datasheets\AMPHENOL_10052824-101LF_Application.pdf, Component Type=Standard, CreateDate=29/11/2017, Family="AirMax VS", HelpURL=\\cern.ch\dfs\Applications\Altium\Datasheets\AMPHENOL_10052824-101LF.pdf, LatestRevisionDate=29/11/2017, Mounted=Yes, Part Description="72 Contacts, 2mm Pitch, 6 Columns, 4 Pairs per Column, 2 Walls, Right Angle Header", Part Number=AMPHENOL_10052824-101LF, Pin Count=72, PressFit=Yes, Sense=No, SMD=No, Socket=No, Status=None
JP2: library part JUMPER, "Jumper", Manufacturer="Global Connector Technology", Manufacturer Part Number=BG030-02-A-0650-0300-N-G, Supplier Part Number 1=1798942, Supplier 1=Farnell
L7 L15: library part IND0402_MURATA_BLM15HD601SN1, "Inductor", Case=0402, Manufacturer=MURATA, Manufacturer Part Number=BLM15HD601SN1D, Power=300mA, Resistance=0.85R, Tolerance=±25%, Author="CERN DEM JLC", ComponentHeight=0.55mm, Component Type=Standard, CreateDate=28/02/2012, HelpURL=\\cern.ch\dfs\Applications\Altium\Datasheets\IND0402_MURATA_BLM15H.pdf, LatestRevisionDate=28/02/2012, Mounted=Yes, Part Description="SMD EMIFIL Suppression Chip Ferrite Bead", Part Number=IND0402_MURATA_BLM15HD601SN1, Pin Count=2, Sense=No, SMD=Yes, Socket=No, Status=None
L9: library part IND_MURATA_DLW21SN900SQ2L, "Inductor Common Mode", Case=0805, Manufacturer=MURATA, Manufacturer Part Number=DLW21SN900SQ2L, Power=330mA, Resistance=0.35R, Tolerance=±25%, Author="CERN DEM JLC", ComponentHeight=1.4mm, Component Type=Standard, CreateDate=01.07.2014, HelpURL=\\cern.ch\dfs\Applications\Altium\Datasheets\IND_MURATA_DLW21S.pdf, LatestRevisionDate=01.07.2014, Mounted=Yes, Part Description="Wire Wound Common Mode Choke Coil (DLW21S Series)", Part Number=IND_MURATA_DLW21SN900SQ2L, Pin Count=4, Sense=No, SMD=Yes, Socket=No, Status=None
LD1 LD2 LD3: library part LED_DIALIGHT_571-0112F, "2x LED  Botom Green, Top Red", Manufacturer=DIALIGHT, Manufacturer Part Number=571-0112F, Author="CERN DEM JLC", Bonding=No, Color=Red/Green, Component Type=Standard, ComponentHeight=8.6mm, HelpURL=\\cern.ch\dfs\Applications\Altium\Datasheets\LED_DIALIGHT_571-0112F.pdf, Mounted=Yes, PackageDescription="2x 2mm LED (Top: Red, Bot: Green) PCB Edge Mounting (Without positioning pins) DIALIGHT 571 Serie", Part Description="Dual 2mm  LEDs, Red Top,Green Bot, CBI® Circuit Board Indicator (Without positioning pins)", Part Number=LED_DIALIGHT_571-0112F, Pin Count=4, PressFit=No, Sense=No, SMD=No, Socket=No
  LD1: CreateDate=09.11.2009, LatestRevisionDate=17.03.2010
  LD2 LD3: CreateDate=09/11/2009, LatestRevisionDate=17/03/2010
LD4 LD5 LD6 LD7 LD8: library part LED_KINGBRIGHT_KPH-1608CGCK, "LED Green 1C 2A", Manufacturer=KINGBRIGHT, Manufacturer Part Number=KPH-1608CGCK, Author="CERN DEM JLC", Bonding=No, Color=Green, ComponentHeight=0.65mm, Component Type=Standard, HelpURL=\\cern.ch\dfs\Applications\Altium\Datasheets\LED_KINGBRIGHT_KPH-1608CGCK.pdf, Mounted=Yes, PackageDescription="SMT Green LED, Case 0603, Body L 1.6 x W 0.8mm H 0.65mm", Part Description="SMD Green LED, Case 1.6mmX0.8mm(0603), 0.65mm Thickness", Part Number=LED_KINGBRIGHT_KPH-1608CGCK, Pin Count=2, PressFit=No, Sense=No, SMD=Yes, Socket=No
  LD4 LD5 LD8: CreateDate=03/07/2017, LatestRevisionDate=03/07/2017
  LD6 LD7: CreateDate=03.07.2017, LatestRevisionDate=03.07.2017
OSC1: library part OSC_100MHZ_ECS_ECS-3953M-1000-BN, "Oscillator 4 pins 1=E/D 2=GND 3=OUT 4=VDD", Manufacturer=ECS, Manufacturer Part Number=ECS-3953M-1000-BN, Author="CERN DEM BC", Bonding=No, Component Type=Standard, ComponentHeight=1.7mm, CreateDate=07.05.2020, HelpURL=\\cern.ch\dfs\Applications\Altium\Datasheets\OSC_ECS_ECS-3953M-BN.pdf, LatestRevisionDate=07.05.2020, Mounted=Yes, PackageDescription="SMD Oscillator, 4 pins, 7 x 5mm, ECS-3951/3953M-BN Series", Part Description="3.3V, ±50ppm, 15pF, -40 to 85°C, Surface Mount Clock Oscillator (ECS-3951M/3953M-BN Series)", Part Number=OSC_100MHZ_ECS_ECS-3953M-1000-BN, Pin Count=4, PressFit=No, Sense=No, SMD=Yes, Socket=No
P1: "WR-PHD Pin Header, THT, pitch 2.54mm, Single Row, Vertical, 6p", Contact Resistance=20mOhm, Manufacturer="Wurth Elektronik", Operating Temperature="-40 to +105degC", Rated Current=3A, Withstanding Voltage=500VAC, Working Voltage=250VAC, ComponentLink1Description=Manufacturer, ComponentLink1URL=http://www.we-online.de, ComponentLink2Description=Datasheet, ComponentLink2URL=https://www.we-online.com/catalog/datasheet/61300611121.pdf, Gender="Pin Header", Manufacturer Part Number=61300611121, Mounting Technology=THT, Orientation=Vertical, Packaging=Bag, Pin Number=6, Pitch=2.54mm, Published Date="May 2020", Row Number=Single
Q1: library part XTAL_8MHZ_TXC_7A-8.000MAAE-T, "Quartz Crystal", Manufacturer="TXC CORPORATION", Manufacturer Part Number=7A-8.000MAAE-T, Author="CERN DEM JLC", Bonding=No, ComponentHeight=1.2mm, Component Type=Standard, CreateDate=09/10/2014, HelpURL=\\cern.ch\dfs\Applications\Altium\Datasheets\XTAL_TXC_7A.pdf, LatestRevisionDate=12/11/2014, Mounted=Yes, PackageDescription="2 Pins, 3.2x5mm, SMD Glass Seam Sealing Crystal, 7A Serie", Part Description="Tolerance: ±30ppm, Stability: ±30ppm, -20°C to +70°C, 12pF, SMD Glass Seam Sealing Crystal, 7A Series", Part Number=XTAL_8MHZ_TXC_7A-8.000MAAE-T, Pin Count=2, PressFit=No, Sense=No, SMD=Yes, Socket=No
Q2: library part XTAL_25MHZ_ABRACON_ABLS-25.000MHZ-B2F-T, "Quartz Crystal", Manufacturer=ABRACON, Manufacturer Part Number=ABLS-25.000MHZ-B2F-T, Author="CERN DEM JLC", Bonding=No, ComponentHeight=4.2mm, Component Type=Standard, CreateDate=03/06/2010, HelpURL=\\cern.ch\dfs\Applications\Altium\Datasheets\XTAL_ABRACON_ABLS.pdf, LatestRevisionDate=15/02/2018, Mounted=Yes, PackageDescription="SMD Crystal, Body 11.40mm L X 4.70mm W X 4.20mm H, HC/49US (AT49) ALBS Series", Part Description="Tolerance: ± 20ppm, Stability: ± 50ppm, -20°C to +70°C, 18pF, 40 Ohms ESR, Low Profile Surface Mount Microprocessor Crystal, ABLS Series", Part Number=XTAL_25MHZ_ABRACON_ABLS-25.000MHZ-B2F-T, Pin Count=2, PressFit=No, Sense=No, SMD=Yes, Socket=No
R1 R2 R131 R132: library part R0402_2K2_1%_0.0625W_100PPM, "Resistor - 1%", Case=0402, Manufacturer=GENERIC, Manufacturer1 ComponentHeight=0.4mm, Manufacturer1 Example="YAGEO PHYCOMP", Manufacturer1 Part Number=232270672202L, Power=0.0625W, Tolerance=±1%, Author="CERN DEM JLC", Component Type=Standard, CreateDate=03.12.2007, HelpURL=\\cern.ch\dfs\Applications\Altium\Datasheets\R0402_Phycomp_RC0402.pdf, LatestRevisionDate=17.10.2012, Manufacturer Part Number=R0402_2K2_1%_0.0625W_100PPM, Mounted=Yes, Part Description="General Purpose Thick Film Chip Resistor", Part Number=R0402_2K2_1%_0.0625W_100PPM, Pin Count=2, PressFit=No, Sense=No, SMD=Yes, Socket=No, Status="Not Recommended", TC=±100ppm/°C